# Altium PCB ADC-DAC Converter.PcbDoc
Units mil, origin at the board's own origin, x right, y up, seen from the top; angles counter-clockwise.
Board outline 2000.02 x 2600 mil, 2 copper layers (Top Layer, Bottom Layer); 39 components, 43 nets, 181 pads, 60 vias.
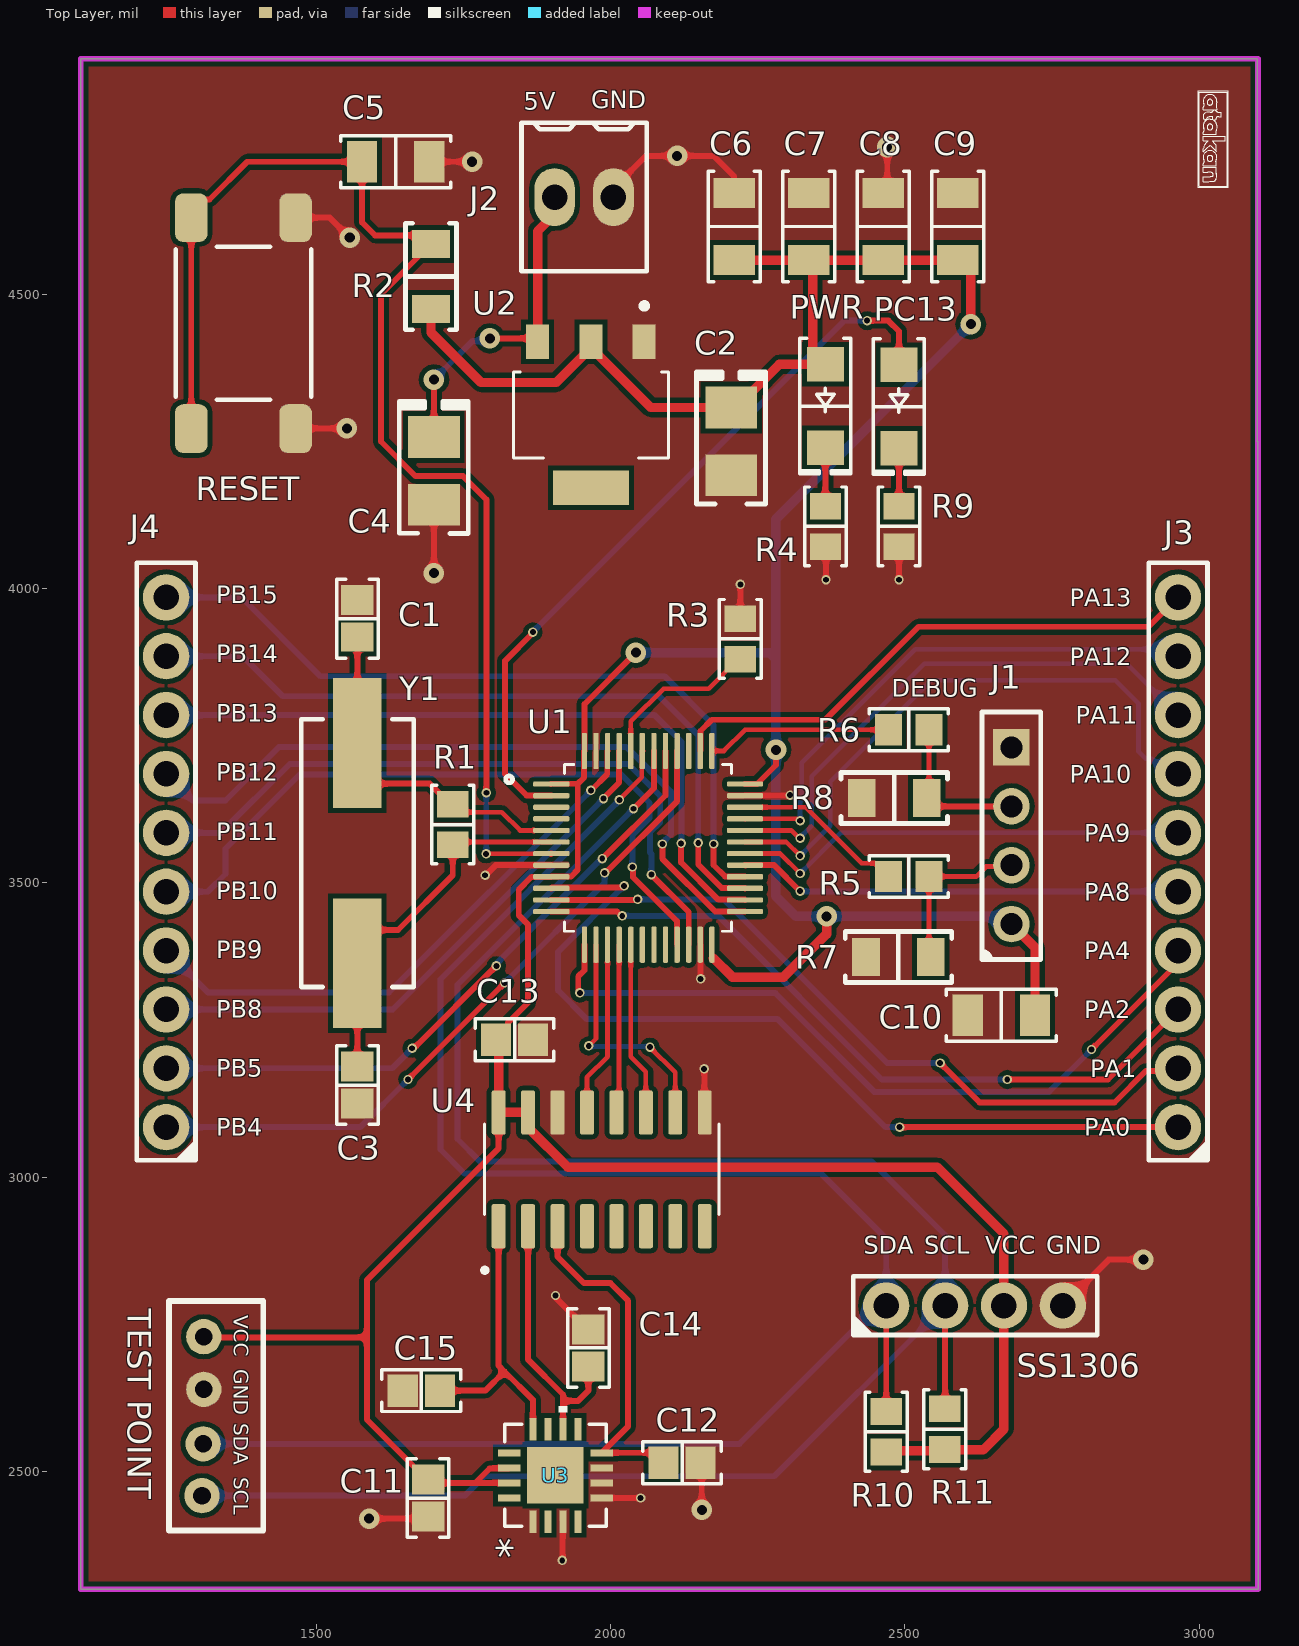
[diagram p0: Top Layer view]
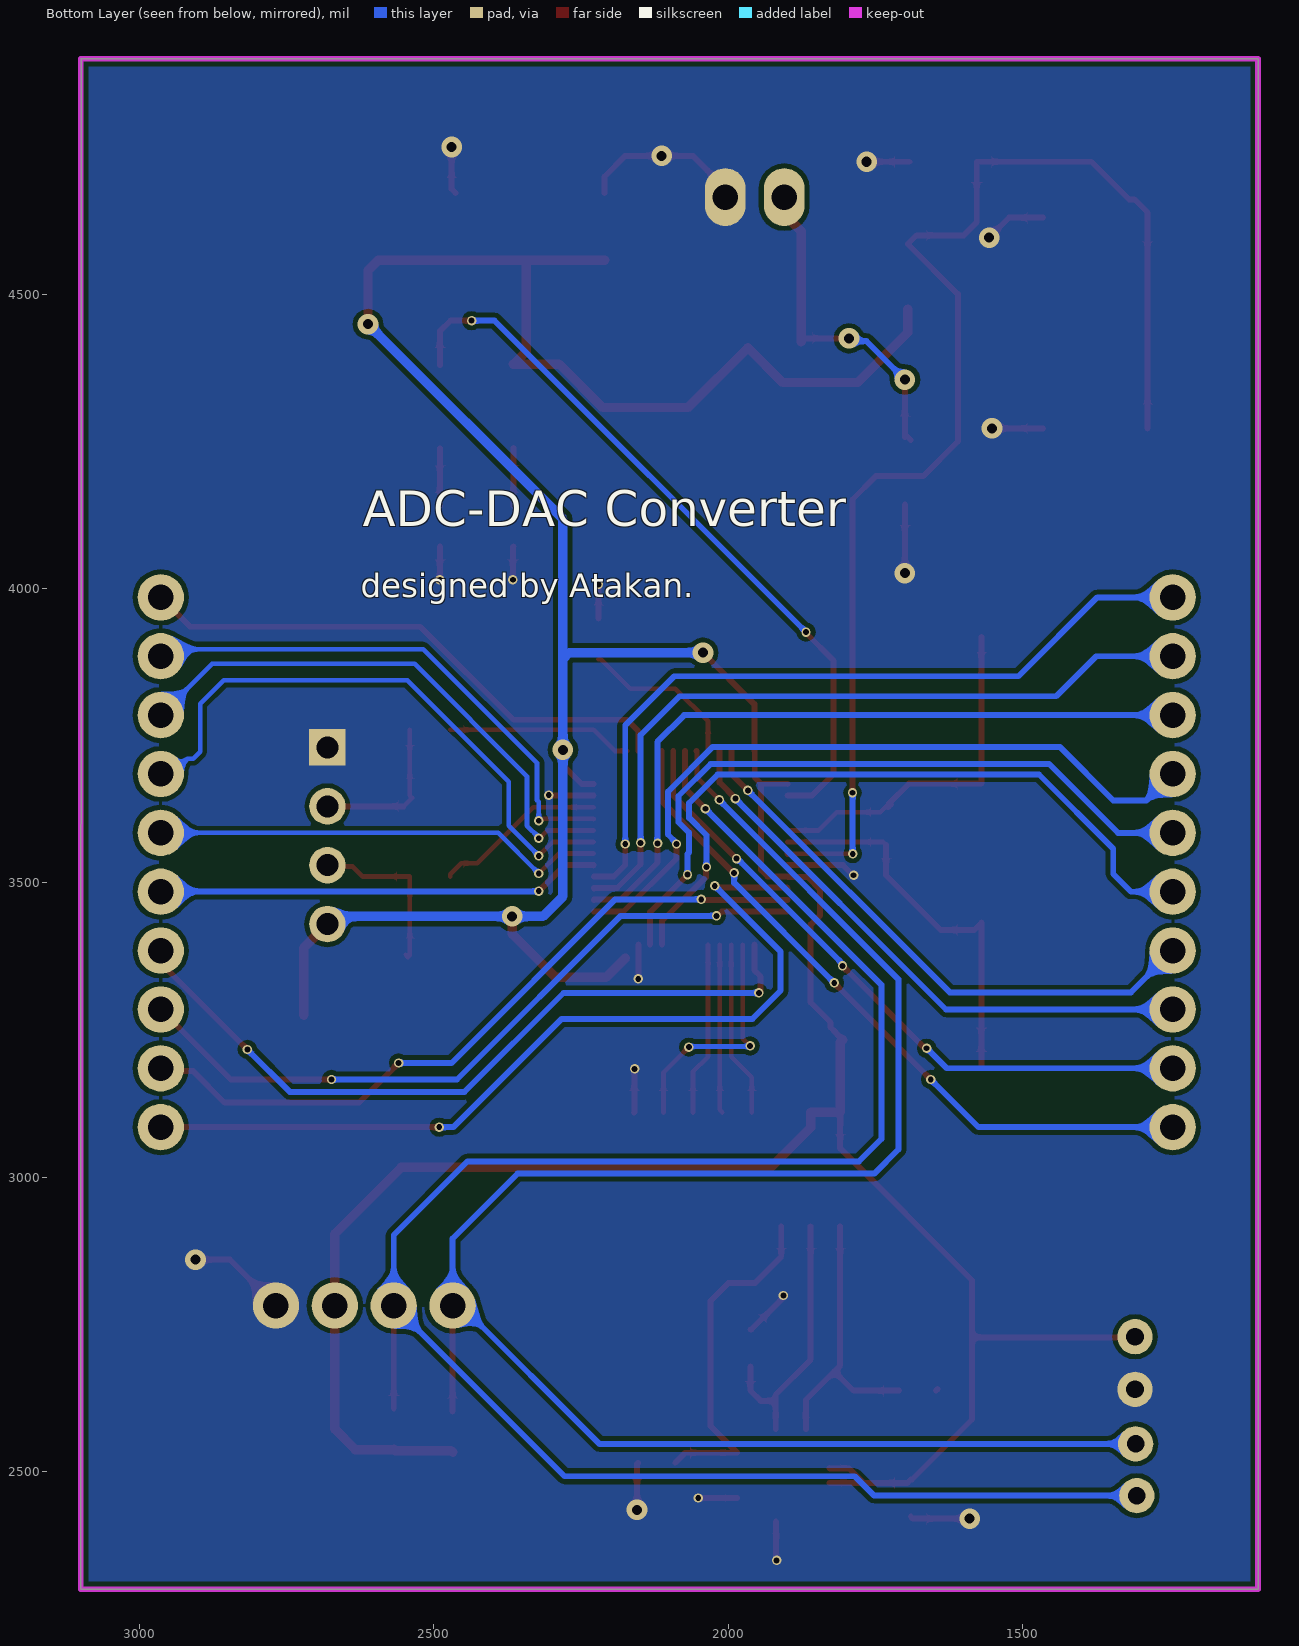
[diagram p1: Bottom Layer view, seen from below]
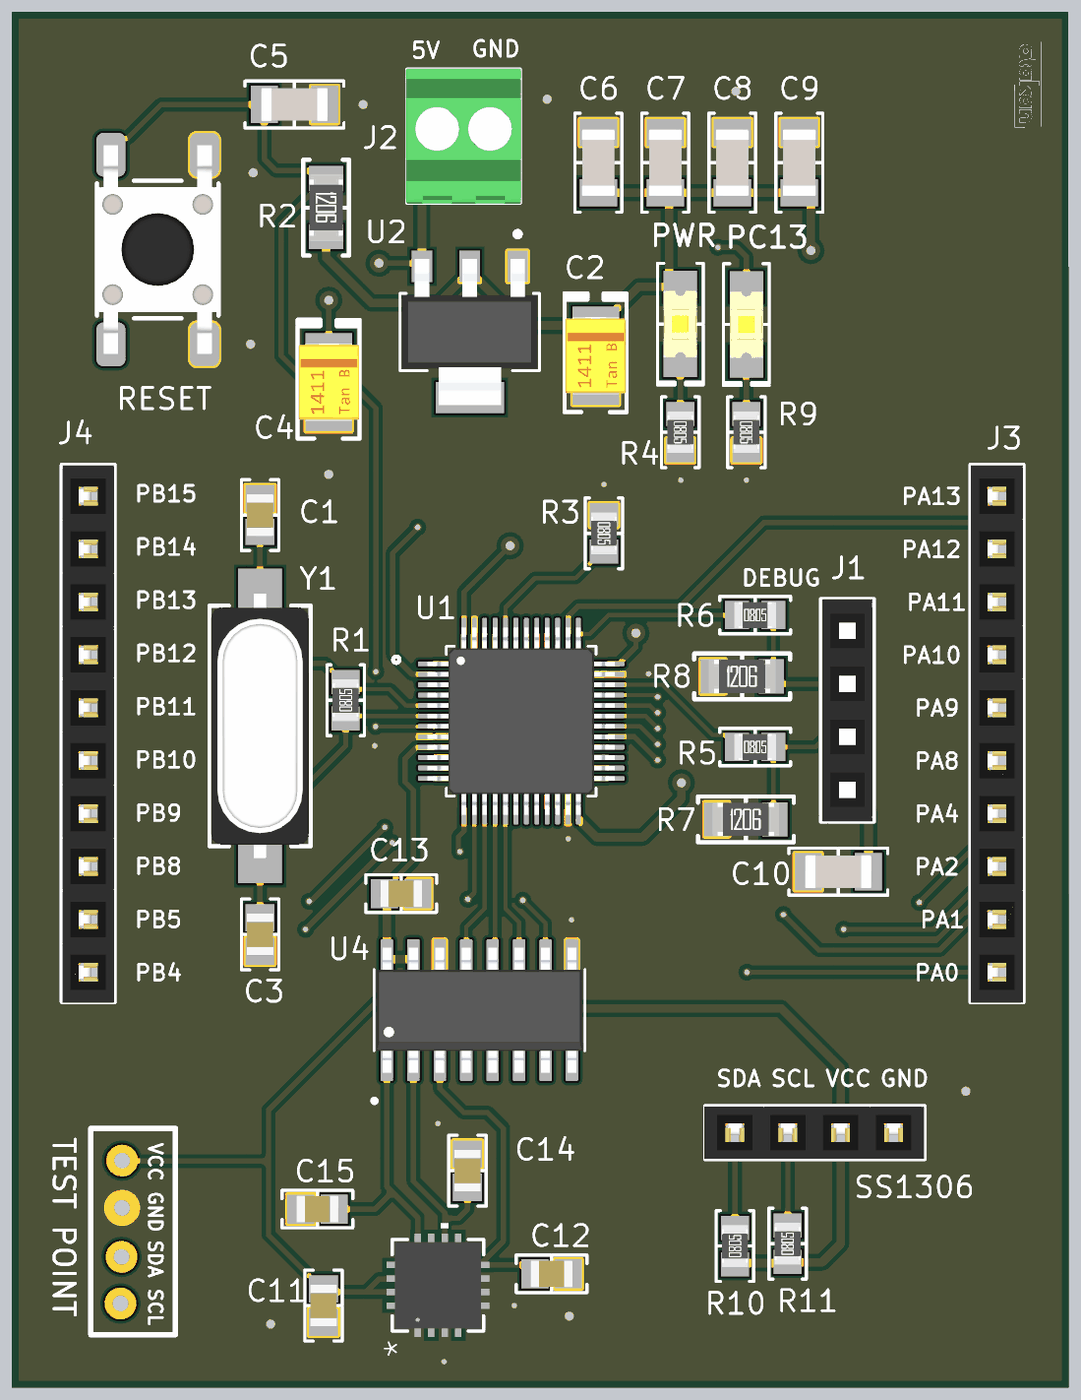
[diagram p2: 3D render of the assembled board from above, using the file's embedded part models]

## Layer stack, top to bottom
Top Solder: solder mask 0.4, Solder Resist, Dk 3.5
Top Layer: signal copper 1.4
Dielectric 1: dielectric 12.6, FR-4, Dk 4.8
Bottom Layer: signal copper 1.4
Bottom Solder: solder mask 0.4, Solder Resist, Dk 3.5

## Board outline
1100,2300 3100,2300 3100.02,2300 3099,4900 1100,4900

## Design rules (kind name [scope] priority, off if disabled: settings)
Clearance [All] p1: gap=8 ignorepadtopadclearanceinfootprint=TRUE
MinimumSolderMaskSliver [All] p1: minsoldermaskwidth=1
PolygonConnect [All] p1: connectstyle=Direct reliefconductorwidth=10 reliefentries=4 polygonreliefangle="90 Angle" airgapwidth=10
RoutingVias [All] p1: holewidth=17 width=35 viastyle="Through Hole" minholewidth=10 minwidth=10 maxholewidth=28 maxwidth=50
SilkToSolderMaskClearance [IsPad] p1: minsilkscreentomaskgap=2.9 clearancetoexposedcopper=TRUE
SolderMaskExpansion [All] p1: expansion=4
Width [All] p1: maxlimit=20 minlimit=8 preferedwidth=16 minimp=50.000000 maximp=50.000000 favimp=50.000000
28 further rules are at their usual default settings.

## Components (designator, comment, footprint, x,y, rotation, side; value= is the part's Value field where it differs from the comment)
C1 "22 pF" "CAP 0805_2012"#1 1570,3948.9 r270 top
C2 "100uF" "CAP POL 1411_3528" 2205,4250 r270 top value="100 µF"
C3 "22 pF" "CAP 0805_2012"#2 1570,3156.5 r90 top
C4 "10 µF" "CAP POL 1411_3528" 1700,4200 r270 top
C5 "0.1 µF" "CAP 1206_3216 - 0.8MM" 1635,4725 r180 top
C6 "0.1 µF" "CAP 1206_3216 - 0.8MM" 2210,4615 r270 top
C7 "0.1 µF" "CAP 1206_3216 - 0.8MM" 2336.67,4615 r270 top
C8 "0.1 µF" "CAP 1206_3216 - 0.8MM" 2463.33,4615 r270 top
C9 "0.1 µF" "CAP 1206_3216 - 0.8MM" 2590,4615 r270 top
C10 "0.1 µF" "CAP 1206_3216 - 0.8MM" 2663.91,3275 r0 top
C11 "0.1 µF" "CAP 0805_2012"#2 1690,2455 r90 top
C12 "0.1 µF" "CAP 0805_2012"#2 2121.5,2515 r180 top
C13 "0.1 µF" "CAP 0805_2012"#2 1836.96,3233.63 r180 top
C14 "0.1 µF" "CAP 0805_2012"#2 1962.4,2710 r270 top
C15 "0.1 µF" "CAP 0805_2012"#2 1678.5,2637.4 r0 top
J1 "SSW-104-03-T-S" "SAMTEC SSW-104-03-T-S" 2681,3580 r90 top
J2 "282834-2" "TE 282834-2" 1955,4665 r0 top
J3 "M20-7821042" "HARWIN M20-7821045" 2964,3535 r180 top
J4 "M20-7821042" "HARWIN M20-7821045" 1245,3535 r180 top
PC13 "Yellow" "LED 1206_3216 YELLOW" 2490,4309.13 r270 top (schematic designator D2)
PWR "Yellow" "LED 1206_3216 YELLOW" 2365,4310 r270 top (schematic designator D1)
R1 "1 MOhms" "RES 0805_2012" 1732,3599 r90 top
R2 "10 kOhms" "RES 1206_3216" 1695,4530 r270 top
R3 "10kΩ" "RES 0805_2012" 2220.47,3914.45 r270 top value=10k?
R4 "470Ω" "RES 0805_2012" 2365,4105.55 r270 top value=470?
R5 "22Ω" "RES 0805_2012" 2506.55,3510.76 r0 top value=22?
R6 "22Ω" "RES 0805_2012" 2506.55,3760 r0 top value=22?
R7 "10 kOhms" "RES 1206_3216" 2489,3374 r0 top
R8 "10 kOhms" "RES 1206_3216" 2481.94,3644.24 r0 top
R9 "470Ω" "RES 0805_2012" 2490,4105.55 r270 top value=470?
R10 "4.7kΩ" "RES 0805_2012" 2468.33,2567.55 r90 top value=4.7k?
R11 "4.7kΩ" "RES 0805_2012" 2567.9,2572 r90 top value=4.7k?
RESET "FSM6JSMA" "TE FSM6JSMA" 1376.42,4450.87 r180 top (schematic designator S1)
SS1306 "M20-7820442" "HARWIN M20-7820445" 2618.33,2782 r90 top (schematic designator J5)
U1 "STM32F103C8T6" QFP50P900X900X160-48N 2063.9,3559.57 r0 top
U2 "LT1117CST-3.3" REG_LT1117CST-3.3 1966.73,4295 r270 top
U3 "ADXL325BCPZ-RL7" CP_16_5A_ADI-M 1906.5,2493.46 r90 top
U4 "MCP3208-CI/SL" SOIC127P600X175-16N 1985,3013.35 r90 top
Y1 "8 MHz" "ABRACON ABLS" 1570,3550.47 r90 top

## Footprints (in the part's own frame and the unit in brackets; to place one, negate y for a bottom-side part, rotate by r counter-clockwise, add the part's x,y. Pads: shape width x height; smd on the part's side, far side on the other; paste and mask are expansions set on the pad)
"ABRACON ABLS" [mm] "Crystal, 2-Leads, Body 4.70x11.40mm, Pitch 8.80mm, IPC Medium Density"
  rect 5.6x2.1 smd: 1(-4.75,0) 2(4.75,0)
  silkscreen extent -5.77,-2.43 5.77,2.43, body extent -6.35,-2.35 6.35,2.35, height 4.2
"CAP 0805_2012"#1 [mm] "Chip Capacitor, 2-Leads, Body 2.00x1.20mm, IPC Medium Density"
  rect 1.3x1.4 smd: 1(-0.8,0)
  rect 1.249x1.4 smd: 2(0.8,0)
  silkscreen extent -1.7,-0.9 1.7,0.9, body extent -1,-0.64 1,0.64, height 1.26
"CAP 0805_2012"#2 [mm] "Chip Capacitor, 2-Leads, Body 2.00x1.20mm, IPC Medium Density"
  rect 1.3x1.4 smd: 1(-0.8,0) 2(0.8,0)
  silkscreen extent -1.7,-0.9 1.7,0.9, body extent -1,-0.64 1,0.64, height 1.26
"CAP 1206_3216 - 0.8MM" [mm] "Chip Capacitor, 2-Leads, Body 3.25x1.60mm, IPC Medium Density"
  rect 1.3x1.8 smd: 1(-1.45,0) 2(1.45,0)
  silkscreen extent -2.37,-1.12 2.37,1.12, body extent -1.6,-0.8 1.6,0.8, height 0.8
"CAP POL 1411_3528" [mm] "Molded Capacitor, 2-Leads, Body 3.50x2.80mm, IPC Medium Density"
  rect 1.8x2.23 smd: 1(-1.46,0) 2(1.46,0)
  silkscreen extent -3,-1.5 2.71,1.48, body extent -1.87,-1.45 1.86,1.45, height 2
CP_16_5A_ADI-M [mil]
  rect 38x12 smd paste+0 mask+0: 1(-78.5,38.39) 2(-78.5,12.8) 3(-78.5,-12.8) 4(-78.5,-38.39) 9(78.5,-38.39) 10(78.5,-12.8) 11(78.5,12.8) 12(78.5,38.39)
  rect 12x38 smd paste+0 mask+0: 5(-38.39,-78.5) 6(-12.8,-78.5) 7(12.8,-78.5) 8(38.39,-78.5) 13(38.39,78.5) 14(12.8,78.5) 15(-12.8,78.5) 16(-38.39,78.5)
  rect 96x96 smd paste+0 mask+0: 17(0,0)
  silkscreen extent -86,-86 118,86, body extent -81,-81 81,81, height 59
"HARWIN M20-7820445" [mm] "2.54mm DIL PC TAIL PIN HEADER ASSEMBLY"
  round 2 hole 1.1: 1(0,3.81) 2(0,1.27) 3(0,-1.27) 4(0,-3.81)
  silkscreen extent -1.27,-5.3 1.27,5.27, body extent -1.25,-5.28 1.25,5.28, height 8.5
"HARWIN M20-7821045" [mm] "2.54mm DIL PC TAIL PIN HEADER ASSEMBLY"
  round 2 hole 1.1: 1(0,11.43) 2(0,8.89) 3(0,6.35) 4(0,3.81) 5(0,1.27) 6(0,-1.27) 7(0,-3.81) 8(0,-6.35) 9(0,-8.89) 10(0,-11.43)
  silkscreen extent -1.27,-12.93 1.27,12.89, body extent -1.25,-12.9 1.25,12.9, height 8.5
"LED 1206_3216 YELLOW" [mm] "Chip Diode, 2-Leads, Body 3.13x1.55mm, IPC Medium Density"
  rect 1.5x1.6 smd: 1(-1.8,0) 2(1.8,0)
  silkscreen extent -2.92,-1.1 2.92,1.1, body extent -1.6,-0.8 1.6,0.8, height 0.9
QFP50P900X900X160-48N [mm]
  rrect50% 1.56x0.229 smd: 1(-4.18,2.75) 2(-4.18,2.25) 3(-4.18,1.75) 4(-4.18,1.25) 5(-4.18,0.75) 6(-4.18,0.25) 7(-4.18,-0.25) 8(-4.18,-0.75) 9(-4.18,-1.25) 10(-4.18,-1.75) 11(-4.18,-2.25) 12(-4.18,-2.75) 25(4.18,-2.75) 26(4.18,-2.25) 27(4.18,-1.75) 28(4.18,-1.25) 29(4.18,-0.75) 30(4.18,-0.25) 31(4.18,0.25) 32(4.18,0.75) 33(4.18,1.25) 34(4.18,1.75) 35(4.18,2.25) 36(4.18,2.75)
  rrect50% 0.229x1.56 smd: 13(-2.75,-4.18) 14(-2.25,-4.18) 15(-1.75,-4.18) 16(-1.25,-4.18) 17(-0.75,-4.18) 18(-0.25,-4.18) 19(0.25,-4.18) 20(0.75,-4.18) 21(1.25,-4.18) 22(1.75,-4.18) 23(2.25,-4.18) 24(2.75,-4.18) 37(2.75,4.18) 38(2.25,4.18) 39(1.75,4.18) 40(1.25,4.18) 41(0.75,4.18) 42(0.25,4.18) 43(-0.25,4.18) 44(-0.75,4.18) 45(-1.25,4.18) 46(-1.75,4.18) 47(-2.25,4.18) 48(-2.75,4.18)
  silkscreen extent -6.15,-3.6 3.6,3.6, body extent -4.5,-4.5 4.5,4.5, height 1.6
REG_LT1117CST-3.3 [mil]
  rect 59x39 smd: 1(-124,90.5) 2(-124,0) 3(-124,-90.5)
  rect 59x129 smd: 4(124,0)
  silkscreen extent -189,-132 73,132, body extent -138,-128 138,128, height 71
"RES 0805_2012" [mm] "Chip Resistor, 2-Leads, Body 2.00x1.25mm, IPC Medium Density"
  rect 1.15x1.35 smd: 1(-0.875,0) 2(0.875,0)
  silkscreen extent -1.7,-0.9 1.7,0.9, body extent -1,-0.62 1,0.63, height 0.6
"RES 1206_3216" [mm] "Chip Resistor, 2-Leads, Body 3.13x1.55mm, IPC Medium Density"
  rect 1.2x1.65 smd: 1(-1.4,0) 2(1.4,0)
  silkscreen extent -2.3,-1.1 2.3,1.1, body extent -1.6,-0.8 1.6,0.8, height 0.6
"SAMTEC SSW-104-03-T-S" [mil]
  round 62 hole 37.4: 1(-150,0) 2(-50,0) 3(50,0)
  rect 62x62 hole 37.4: 4(150,0)
  silkscreen extent -210,-50 210,50, body extent -210,-47 210,48, height 335
SOIC127P600X175-16N [mm]
  rrect25% 1.9x0.6 smd: 1(-2.455,4.445) 2(-2.455,3.175) 3(-2.455,1.905) 4(-2.455,0.635) 5(-2.455,-0.635) 6(-2.455,-1.905) 7(-2.455,-3.175) 8(-2.455,-4.445) 9(2.455,-4.445) 10(2.455,-3.175) 11(2.455,-1.905) 12(2.455,-0.635) 13(2.455,0.635) 14(2.455,1.905) 15(2.455,3.175) 16(2.455,4.445)
  silkscreen extent -4.45,-5.06 1.95,5.14, body extent -3,-4.95 3,4.95, height 1.75
"TE 282834-2" [mm]
  oval 1.75x2.5 hole 1.1: 1(-1.27,0) 2(1.27,0)
  silkscreen extent -2.7,-3.2 2.7,3.2, body extent -2.77,-3.25 2.77,3.25, height 10
"TE FSM6JSMA" [mm]
  rrect50% 1.4x2.1 smd: 1(2.25,4.55) 2(2.25,-4.55) 3(-2.25,4.55) 4(-2.25,-4.55)
  silkscreen extent -2.92,-3.3 2.92,3.3, body extent -3,-5 3,5, height 7.11

## Part data
C1 C3: library part 885012007030, "CAP CER 22PF 25V C0G/NP0 0805", Device Package="0805 (2012 Metric)", manufacturer="Würth Elektronik", Operating Temperature="-55°C ~ 125°C", Supplier Part Number 1=732-7829-1-ND, Temperature Coefficient="C0G, NP0", Tolerance=±5%, Voltage - Rated=25V, Applications="General Purpose", componentlink1description=Datasheet, componentlink1url=https://katalog.we-online.de/pbs/datasheet/885012007030.pdf, componentlink2description="DigiKey Link", componentlink2url=https://www.digikey.com/en/products/detail/würth-elektronik/885012007030/5453684, lastupdated="9.02.2024 20:15:45", Lifecycle Status=Active, Minimum Order=1, Mounting Type="Surface Mount, MLCC", Package / Case="0805 (2012 Metric)", packaging=TapeAndReel, partid=11788, Part Number=885012007030, Part Status=Active, price=0.03, series=WCAP-CSGP, Size / Dimension="0.079\" L x 0.049\" W (2.00mm x 1.25mm)", Supplier 1=DigiKey, Thickness (Max)="0.028\" (0.70mm)"
  C1: Capacitance="22 pF"
C2: library part T491T106K016AT, "CAP TANT 100UF 10% 16V 1411", Capacitance="100 uF", Device Package="1411 (3528 Metric)", ESR (Equivalent Series Resistance)=8Ohm, Lifetime @ Temp.="2000 Hrs @ 125°C", manufacturer=KEMET, Manufacturer Size Code=T, Operating Temperature="-55°C ~ 125°C", Supplier Part Number 1=399-8400-1-ND, Tolerance=±10%, Voltage - Rated="16 V", componentlink1description=Datasheet, componentlink1url=https://api.kemet.com/component-edge/download/datasheet/T491T106K016AT.pdf, componentlink2description="DigiKey Link", componentlink2url=https://www.digikey.com/en/products/detail/kemet/T491T106K016AT/2336362, Features="General Purpose", Height - Seated (Max)="0.047\" (1.20mm)", lastupdated="3.06.2024 19:29:03", Lifecycle Status=Active, Minimum Order=1, Mounting Type="Surface Mount", Package / Case="1411 (3528 Metric)", packaging=TapeAndReel, partid=5, Part Number=T491T106K016AT, Part Status=Active, price=0.42, series=T491, Size / Dimension="0.138\" L x 0.110\" W (3.50mm x 2.80mm)", Supplier 1=DigiKey, Type=Molded
C4: library part T491T106K016AT, "CAP TANT 10UF 10% 16V 1411", Device Package="1411 (3528 Metric)", ESR (Equivalent Series Resistance)=8Ohm, Lifetime @ Temp.="2000 Hrs @ 125°C", manufacturer=KEMET, Manufacturer Size Code=T, Operating Temperature="-55°C ~ 125°C", Supplier Part Number 1=399-8400-1-ND, Tolerance=±10%, Voltage - Rated="16 V", Capacitance="10 µF", componentlink1description=Datasheet, componentlink1url=https://api.kemet.com/component-edge/download/datasheet/T491T106K016AT.pdf, componentlink2description="DigiKey Link", componentlink2url=https://www.digikey.com/en/products/detail/kemet/T491T106K016AT/2336362, Features="General Purpose", Height - Seated (Max)="0.047\" (1.20mm)", lastupdated="3.06.2024 19:29:03", Lifecycle Status=Active, Minimum Order=1, Mounting Type="Surface Mount", Package / Case="1411 (3528 Metric)", packaging=TapeAndReel, partid=5, Part Number=T491T106K016AT, Part Status=Active, price=0.42, series=T491, Size / Dimension="0.138\" L x 0.110\" W (3.50mm x 2.80mm)", Supplier 1=DigiKey, Type=Molded
C5 C6 C7 C8 C9 C10: library part C1206C104K8RAC7800, "CAP CER 0.1UF 10V X7R 1206", Device Package="1206 (3216 Metric)", manufacturer=KEMET, Operating Temperature="-55°C ~ 125°C", Supplier Part Number 1=399-15539-1-ND, Temperature Coefficient=X7R, Tolerance=±10%, Voltage - Rated=10V, Applications="Bypass, Decoupling", componentlink1description=Datasheet, componentlink1url=https://api.kemet.com/component-edge/download/datasheet/C1206C104K8RACTU.pdf, componentlink2description="DigiKey Link", componentlink2url=https://www.digikey.com/en/products/detail/kemet/C1206C104K8RAC7800/2215080, lastupdated="4.06.2024 19:10:37", Lifecycle Status=Active, Minimum Order=1, Mounting Type="Surface Mount, MLCC", Package / Case="1206 (3216 Metric)", packaging=TapeAndReel, partid=19429, Part Number=C1206C104K8RAC7800, Part Status=Active, price=0.07, series="SMD Comm X7R", Size / Dimension="0.126\" L x 0.063\" W (3.20mm x 1.60mm)", Supplier 1=DigiKey, Thickness (Max)="0.035\" (0.88mm)"
C11 C12 C13 C14 C15: library part 0805Y0250104KXT, "CAP CER 0.1UF 25V X7R 0805", Device Package="0805 (2012 Metric)", manufacturer="Knowles Syfer", Operating Temperature="-55°C ~ 125°C", Supplier Part Number 1=1608-1010-1-ND, Temperature Coefficient=X7R, Tolerance=±10%, Voltage - Rated=25V, Applications="Boardflex Sensitive", Capacitance="0.1 µF", componentlink1description=Datasheet, componentlink1url=https://www.knowlescapacitors.com/getattachment/2dbfc8bc-e2b3-4b4d-afb1-43b011b9ebe0/High-Std-Voltage.aspx, componentlink2description="DigiKey Link", componentlink2url=https://www.digikey.com/en/products/detail/knowles-syfer/0805Y0250104KXT/5729991, Features="Soft Termination", lastupdated="9.02.2024 20:16:06", Lifecycle Status=Active, Minimum Order=1, Mounting Type="Surface Mount, MLCC", Package / Case="0805 (2012 Metric)", packaging=TapeAndReel, partid=3471, Part Number=0805Y0250104KXT, Part Status=Active, price=0.15, series=FlexiCap™, Size / Dimension="0.079\" L x 0.049\" W (2.00mm x 1.25mm)", Supplier 1=DigiKey, Thickness (Max)="0.051\" (1.30mm)"
J1: "CONN RCPT 4POS 0.1 TIN PCB", Current Rating (Amps)="5.7A per Contact", Insulation Color=Black, manufacturer="Samtec Inc.", Material Flammability Rating="UL94 V-0", Operating Temperature="-55°C ~ 105°C", Supplier Part Number 1=SSW-104-03-T-S-ND, componentlink2description="DigiKey Link", componentlink2url=http://digikey.com/product-detail/en/samtec-inc/SSW-104-03-T-S/SSW-104-03-T-S-ND/7874034, Connector Type=Receptacle, Contact Finish - Mating=Tin, Contact Finish - Post=Tin, Contact Type=Forked, Fastening Type=Push-Pull, lastupdated="21.06.2022 15:08:52", Lifecycle Status=Active, Minimum Order=1, Mounting Type="Through Hole", Number of Positions=4, Number of Positions Loaded=All, Number of Rows=1, packaging=Bulk, Part Number=SSW-104-03-T-S, Part Status=Active, price=0.83, series=SSW, Style="Board to Board or Cable", Supplier 1=DigiKey, Termination=Solder
J2: "TERM BLK 2P SIDE ENT 2.54MM PCB", Color=Green, Current=10A, manufacturer="TE Connectivity AMP Connectors", Supplier Part Number 1=A98333-ND, Voltage=150V, componentlink1description=Datasheet, componentlink1url=https://www.te.com/commerce/DocumentDelivery/DDEController?Action=srchrtrv&DocNm=282834&DocType=Customer+Drawing&DocLang=English, componentlink2description="DigiKey Link", componentlink2url=http://digikey.com/product-detail/en/te-connectivity-amp-connectors/282834-2/A98333-ND/1150135, lastupdated="15.01.2020 04:15:38", Lifecycle Status=Active, Mating Orientation="Horizontal with Board", Minimum Order=1, Mounting Type="Through Hole", Number of Levels=1, packaging=Bulk, Part Number=282834-2, Part Status=Active, Pitch="0.100\" (2.54mm)", Positions Per Level=2, price=0.88, series=Buchanan, Supplier 1=DigiKey, Wire Gauge="16-30 AWG", Wire Termination="Screw - Rising Cage Clamp"
J3 J4: "CONN RCPT 10POS 0.1 GOLD PCB", Current Rating (Amps)=3A, Insulation Color=Black, manufacturer="Harwin Inc.", Material Flammability Rating="UL94 V-0", Operating Temperature="-40°C ~ 105°C", Supplier Part Number 1=952-1846-ND, componentlink1description=Datasheet, componentlink1url=https://cdn.harwin.com/pdfs/Harwin_PC_Connectors_M20.pdf, componentlink2description="DigiKey Link", componentlink2url=http://digikey.com/product-detail/en/harwin-inc/M20-7821042/952-1846-ND/3727813, Connector Type=Receptacle, Contact Finish - Mating=Gold, Contact Finish - Post=Tin, Contact Finish Thickness - Mating=Flash, Contact Length - Post="0.118\" (3.00mm)", Contact Type="Female Socket", Fastening Type=Push-Pull, Insulation Height="0.335\" (8.51mm)", lastupdated="21.09.2022 18:59:03", Lifecycle Status=Active, Mated Stacking Heights="11.04mm, 12.63mm", Minimum Order=1, Mounting Type="Through Hole", Number of Positions=10, Number of Positions Loaded=All, Number of Rows=1, packaging=Tube, Part Number=M20-7821042, Part Status=Active, Pitch - Mating="0.100\" (2.54mm)", price=1.39, series=M20, Style="Board to Board or Cable", Supplier 1=DigiKey, Termination=Solder
PC13 PWR: library part 5990240007F, "LED YELLOW 1206 SMD", Current - Test=20mA, Device Package="1206 (3216 Metric)", Lens Color=0.80mm, manufacturer=Dialight, Millicandela Rating=126mcd, Supplier Device Package=1206, Supplier Part Number 1=350-4363-1-ND, Voltage - Forward (Vf) (Typ)=2.1V, Color=Yellow, componentlink1description=Datasheet, componentlink1url=http://www.dialightsignalsandcomponents.com/Assets/Brochures_And_Catalogs/Indication/CBI_SMD_new/Dialight_CBI_data_599-1206_Apr2018.pdf, componentlink2description="DigiKey Link", componentlink2url=https://www.digikey.com/en/products/detail/dialight/5990240007F/9385418, Configuration=Standard, Height (Max)=0.80mm, lastupdated="3.06.2024 20:01:38", Lens Size="2.00mm x 1.60mm", Lens Style="Rectangle with Flat Top", Lifecycle Status=Active, Minimum Order=1, Mounting Type="Surface Mount", Package / Case="1206 (3216 Metric)", packaging=TapeAndReel, partid=1, Part Number=5990240007F, Part Status=Active, price=0.04, series=599, Size / Dimension="3.20mm L x 1.60mm W", Supplier 1=DigiKey, Viewing Angle=140°, Wavelength - Dominant=590nm
R1: library part RCS08051M00FKEA, "RES SMD 1M OHM 1% 1/2W 0805", Device Package="0805 (2012 Metric)", manufacturer="Vishay Dale", Operating Temperature="-55°C ~ 155°C", Power (Watts)="0.5W, 1/2W", Ratings=AEC-Q200, Supplier Device Package=0805, Supplier Part Number 1=541-2853-1-ND, Temperature Coefficient=±100ppm/°C, Tolerance=±1%, componentlink1description=Datasheet, componentlink1url=http://www.vishay.com/docs/20065/rcse3.pdf, componentlink2description="DigiKey Link", componentlink2url=https://www.digikey.com/en/products/detail/vishay-dale/RCS08051M00FKEA/5866999, Composition="Thick Film", Features="Automotive AEC-Q200, Pulse Withstanding", Height - Seated (Max)="0.020\" (0.50mm)", lastupdated="8.02.2024 21:02:38", Lifecycle Status=Active, Minimum Order=1, Number of Terminations=2, Package / Case="0805 (2012 Metric)", packaging=TapeAndReel, partid=27791, Part Number=RCS08051M00FKEA, Part Status=Active, price=0.02, Resistance="1 MOhms", series="RCS e3", Size / Dimension="0.079\" L x 0.049\" W (2.00mm x 1.25mm)", Supplier 1=DigiKey
R2 R7 R8: library part ESR18EZPF1002, "RES SMD 10K OHM 1% 1/2W 1206", Device Package="1206 (3216 Metric)", manufacturer="Rohm Semiconductor", Operating Temperature="-55°C ~ 155°C", Power (Watts)="0.5W, 1/2W", Ratings=AEC-Q200, Supplier Device Package=1206, Supplier Part Number 1=RHM10.0KAFCT-ND, Temperature Coefficient=±100ppm/°C, Tolerance=±1%, componentlink1description=Datasheet, componentlink1url=https://www.rohm.com/datasheet/ESR01MZPF/esr-e, componentlink2description="DigiKey Link", componentlink2url=https://www.digikey.com/en/products/detail/rohm-semiconductor/ESR18EZPF1002/1983592, Composition="Thick Film", Features="Automotive AEC-Q200, Pulse Withstanding", Height - Seated (Max)="0.026\" (0.65mm)", lastupdated="9.02.2024 20:54:45", Lifecycle Status=Active, Minimum Order=1, Number of Terminations=2, Package / Case="1206 (3216 Metric)", packaging=TapeAndReel, partid=26965, Part Number=ESR18EZPF1002, Part Status=Active, price=0.02, Resistance="10 kOhms", series=ESR, Size / Dimension="0.126\" L x 0.063\" W (3.20mm x 1.60mm)", Supplier 1=DigiKey
R3 R4 R5 R6 R9 R10 R11: library part CPF0805B22RE1, "RES SMD 22 OHM 0.1% 1/10W 0805", Device Package="0805 (2012 Metric)", manufacturer="TE Connectivity Passive Product", Operating Temperature="-55°C ~ 155°C", Power (Watts)="0.1W, 1/10W", Resistance="22 Ohms", Supplier Device Package=0805, Supplier Part Number 1=A103179CT-ND, Temperature Coefficient=±25ppm/°C, Tolerance=±0.1%, componentlink1description=Datasheet, componentlink1url=https://www.te.com/commerce/DocumentDelivery/DDEController?Action=srchrtrv&DocNm=1773200&DocType=DS&DocLang=English, componentlink2description="DigiKey Link", componentlink2url=https://www.digikey.com/en/products/detail/te-connectivity-passive-product/CPF0805B22RE1/2381993, Composition="Thin Film", Height - Seated (Max)="0.026\" (0.65mm)", lastupdated="8.02.2024 21:02:36", Lifecycle Status=Active, Minimum Order=1, Number of Terminations=2, Package / Case="0805 (2012 Metric)", packaging=TapeAndReel, partid=28451, Part Number=CPF0805B22RE1, Part Status=Active, price=0.12, series="CPF, Neohm", Size / Dimension="0.079\" L x 0.049\" W (2.00mm x 1.25mm)", Supplier 1=DigiKey
RESET: "SWITCH TACTILE SPST-NO 0.05A 24V", Contact Rating @ Voltage="0.05A @ 24VDC", manufacturer="TE Connectivity ALCOSWITCH Switches", Operating Force=160gf, Operating Temperature="-35°C ~ 85°C", Supplier Part Number 1=450-1133-ND, Actuator Height off PCB, Vertical=7.00mm, Actuator Orientation="Top Actuated", Actuator Type=Standard, Circuit=SPST-NO, componentlink1description=Datasheet, componentlink1url=https://www.te.com/commerce/DocumentDelivery/DDEController?Action=srchrtrv&DocNm=1308111-1_SWITCHES_CORE_PROGRAM_CATALOG&DocType=CS&DocLang=English, componentlink2description="DigiKey Link", componentlink2url=https://www.digikey.com/en/products/detail/te-connectivity-alcoswitch-switches/FSM6JSMA/525822, Illumination=Non-Illuminated, lastupdated="3.06.2024 20:19:31", Lifecycle Status=Active, Minimum Order=1, Mounting Type="Surface Mount", Outline="6.00mm x 6.00mm", packaging=Bulk, Part Number=FSM6JSMA, Part Status=Active, price=0.17, series=FSMJSMA, Supplier 1=DigiKey, Switch Function=Off-Mom, Termination Style="Gull Wing"
SS1306: "CONN RCPT 4POS 0.1 GOLD PCB", Current Rating (Amps)=3A, Insulation Color=Black, manufacturer="Harwin Inc.", Material Flammability Rating="UL94 V-0", Operating Temperature="-40°C ~ 105°C", Supplier Part Number 1=952-1791-ND, componentlink1description=Datasheet, componentlink1url=https://cdn.harwin.com/pdfs/Harwin_PC_Connectors_M20.pdf, componentlink2description="DigiKey Link", componentlink2url=https://www.digikey.com/en/products/detail/harwin-inc/M20-7820442/3727760, Connector Type=Receptacle, Contact Finish - Mating=Gold, Contact Finish - Post=Tin, Contact Finish Thickness - Mating=Flash, Contact Length - Post="0.118\" (3.00mm)", Contact Type="Female Socket", Fastening Type=Push-Pull, Insulation Height="0.335\" (8.51mm)", lastupdated="21.09.2022 18:57:11", Lifecycle Status=Active, Mated Stacking Heights="11.04mm, 12.63mm", Minimum Order=1, Mounting Type="Through Hole", Number of Positions=4, Number of Positions Loaded=All, Number of Rows=1, packaging=Tube, Part Number=M20-7820442, Part Status=Active, Pitch - Mating="0.100\" (2.54mm)", price=0.45, series=M20, Style="Board to Board or Cable", Supplier 1=DigiKey, Termination=Solder
U1: "ARM® Cortex®-M3 STM32F1 Microcontroller IC 32-Bit 72MHz 64KB (64K x 8) FLASH 48-LQFP (7x7)", Package="LQFP-48 STMicroelectronics", Check_prices=https://www.snapeda.com/parts/STM32F103C8T6/STMicroelectronics/view-part/?ref=eda, MF=STMicroelectronics, MP=STM32F103C8T6, SnapEDA_Link=https://www.snapeda.com/parts/STM32F103C8T6/STMicroelectronics/view-part/?ref=snap
U2: "Linear Voltage Regulator IC Positive Fixed 1 Output 800mA SOT-223-3", Package="SOT-223-3 Analog Devices", Check_prices=https://www.snapeda.com/parts/LT1117CST-3.3/Analog+Devices/view-part/?ref=eda, MF="Analog Devices / Linear Technology", MP=LT1117CST-3.3, SnapEDA_Link=https://www.snapeda.com/parts/LT1117CST-3.3/Analog+Devices/view-part/?ref=snap
U3: "No Description Available", Mfr_Name="Analog Devices Inc", RefDes=RefDes, Type=Type
U4: "Microchip 12 bit Serial ADC Differential Input 16-Pin SOIC", Package="SOIC-16 Microchip", Check_prices=https://www.snapeda.com/parts/MCP3208-CI/SL/Microchip/view-part/?ref=eda, MF="Microchip Technology", MP=MCP3208-CI/SL, SnapEDA_Link=https://www.snapeda.com/parts/MCP3208-CI/SL/Microchip/view-part/?ref=snap
Y1: library part ABLS-8.000MHZ-16-A-4-H-T, "CRYSTAL 8.0000MHZ 16PF SMD", ESR (Equivalent Series Resistance)="80 Ohms", Frequency Stability=±35ppm, Frequency Tolerance=±30ppm, Load Capacitance=16pF, manufacturer="Abracon LLC", Operating Mode=Fundamental, Operating Temperature="-10°C ~ 60°C", Package / Case=HC-49/US, Supplier Part Number 1=535-14942-1-ND, componentlink1description=Datasheet, componentlink1url=https://abracon.com/Resonators/abls.pdf, componentlink2description="DigiKey Link", componentlink2url=https://www.digikey.com/en/products/detail/abracon-llc/ABLS-8-000MHZ-16-A-4-H-T/9997850, Frequency="8 MHz", Height - Seated (Max)="0.165\" (4.20mm)", lastupdated="3.06.2024 20:02:02", Lifecycle Status=Active, Minimum Order=1, Mounting Type="Surface Mount", packaging=TapeAndReel, partid=58, Part Number=ABLS-8.000MHZ-16-A-4-H-T, Part Status=Active, price=0.10, series=ABLS, Size / Dimension="0.449\" L x 0.185\" W (11.40mm x 4.70mm)", Supplier 1=DigiKey, Type="MHz Crystal"

## Free pads (board coordinates)
  round 60 hole 30: 2(1309,2639.67) 3(1306,2459) 4(1308,2547) 5(1309,2729)

## Via types
v1: diameter 16, hole 10, Top Layer to Bottom Layer, tented both sides, 45 vias
v2: diameter 35, hole 17, Top Layer to Bottom Layer, tented both sides, 15 vias

## Nets (pads, with @x,y where several pads share a name; then routed paths per layer and width w, separated by ;. In a path a pad name is that pad's centre, name@x,y a point inside that pad or via, vN(x,y) a via of type N, cw(c..) or ccw(c..) an arc to the next point about the centre after c; other vN are vias at no path point)
GND: C1.1 C2.2 C3.1 C4.2 C5.1 C6.1 C7.1 C8.1 C9.1 C10.1 C11.1 C12.1 C13.1 C14.1 C15.1 J1.4 J2.2 pad.2 R3.1 R4.2 R7.1 R8.1 R9.2 RESET.3 RESET.4 SS1306.4 U1.8 U1.23 U1.35 U1.47 U2.1 U3.1 U3.3 U3.5 U3.6 U3.7 U4.9 U4.14 | length 1817.2
  Top Layer w10: RESET.3 1465.27,4272 v2(1552,4272) ; RESET.4 1523,4630 v2(1557,4596) ; v2(1590,2420) 1686.5,2420 C11.1 ; C15.1@1644.41,2640 C15.1 ; C5.1 v2(1765,4725) ; v2(1700,4026) C4.2 ; v1(1787,3513) 1788,3513 1805.04,3530.04 U1.8 ; v1(1906.5,2799) 1907.65,2797.85 1907.65,2794.28 1960.43,2741.5 C14.1 ; v1(1918,2349) 1918.65,2349.65 1918.65,2414.32 U3.3 ; U3.5 v1(2051,2455.08) ; J2.2 2005,4679.76 2060.24,4735 v2(2113.11,4735) 2175,4735 2210,4700 C6.1 ; U1.23 2152.74,3394.74 2152.74,3337.26 v1(2153,3337) ; C12.1 2155,2512.99 v2(2155,2435) ; v1(2159,3184) 2159.5,3183.5 2159.5,3110.5 U4.9 ; R3.1 v1(2220.47,4007) ; U1.35 2228.89,3648.57 2304.57,3648.57 v1(2305,3649) ; R4.2 2366,4070.1 v1(2366,4015) ; C8.1 2470,4678.75 v2(2470,4750) ; v1(2490,4015) R9.2 ; SS1306.4 2846.33,2860 v2(2905,2860)
NetC4_1: C4.1 J2.1 U2.3 | length 577.3
  Top Layer w10: C4.1@1690,4252.48 C4.1@1700,4262.48 ; C4.1 C4.1@1700,4262.48 ; v2(1700,4355) C4.1@1700,4262.48 ; v2(1795,4425) 1870.23,4425 U2.3
  Top Layer w16: U2.3 1876.23,4607.15 1905,4635.92 J2.1
  Bottom Layer w10: v2(1700,4355) 1765.22,4420.22 1790.22,4420.22 v2(1795,4425)
NetD1_2: PWR.2 R4.1 | length 99.1
  Top Layer w10: R4.1 PWR.2
NetD2_2: PC13.2 R9.1 | length 98.3
  Top Layer w10: R9.1 PC13.2
NetR3_2: R3.2 U1.44 | length 280.1
  Top Layer w8: U1.44 2034.37,3774.37 2090,3830 2166.54,3830 2216.54,3880 R3.2
NetR5_1: R5.1 U1.34 | length 294.7
  Top Layer w8: U1.34 2331.25,3628.46 2426.38,3533.34 2453.46,3533.34 2472.1,3514.7 R5.1
NetR6_1: R6.1 U1.37 | length 314.8
  Top Layer w8: U1.37 2192.6,3724.13 2228.46,3760 R6.1
OSCIN: C1.2 R1.2 U1.5 Y1.2 | length 617.9
  Top Layer w8: R1.2@1728.06,3633.45 1741.51,3620 1815.39,3620 1846.3,3589.09 U1.5
  Top Layer w10: C1.2 Y1.2 1570,3668.58 1692.93,3668.58 R1.2@1728.06,3633.45 ; R1.2@1723.54,3633.45 R1.2@1728.34,3628.65
OSCOUT: C3.2 R1.1 U1.6 Y1.1 | length 670.9
  Top Layer w8: R1.1 1736.86,3569.41 U1.6
  Top Layer w10: C3.2 Y1.1 1570,3432.36 1582.36,3420 1639,3420 1732,3513 R1.1
PA0: J3.1 U1.10 | length 1499
  Top Layer w10: U1.10 1900.5,3491.84 2019.84,3491.84 v1(2023,3495) ; v1(2491,3085) J3.1
  Bottom Layer w10: v1(2023,3495) 1911,3383 1911,3317 1959,3269 2283,3269 2467,3085 v1(2491,3085)
PA1: J3.2 U1.11 | length 1232
  Top Layer w10: U1.11 2045,3471 v1(2046,3472) ; v1(2560,3194) 2627,3127 2856,3127 2909.63,3180.63 2959.63,3180.63 J3.2
  Bottom Layer w10: v1(2046,3472) 2192,3472 2470,3194 v1(2560,3194)
PA2: J3.3 U1.12 | length 1232.1
  Top Layer w10: U1.12 2011.08,3451.3 2018.38,3444 v1(2020,3444) ; v1(2674,3166) 2845,3166 J3.3
  Bottom Layer w10: v1(2020,3444) 2182.91,3444 2460.91,3166 v1(2674,3166)
PA3: J3.4 U1.13 | length 1284.8
  Top Layer w10: v1(1948,3313) 1945.12,3315.88 1945.12,3341.12 1955.63,3351.63 U1.13 ; v1(2817,3217) 2964,3364 J3.4
  Bottom Layer w10: v1(1948,3313) 2280,3313 2448,3145 2745,3145 v1(2817,3217)
PA4: U1.14 U4.10 | length 410.7
  Top Layer w8: v1(1963,3223) 1975.31,3235.31 U1.14 ; v1(2067,3221) 2110,3178 U4.10
  Bottom Layer w8: v1(1963,3223) 1964,3222 2066,3222 v1(2067,3221)
PA5: U1.15 U4.13 | length 299.5
  Top Layer w8: U4.13 1960,3170 1995,3205 U1.15
PA6: U1.16 U4.12 | length 286.9
  Top Layer w8: U4.12 2014.51,3114.51 2014.51,3394.83 U1.16
PA7: U1.17 U4.11 | length 295.6
  Top Layer w8: U1.17 2034.37,3205 2060,3179.37 U4.11
PA8: J3.5 U1.29 | length 754.9
  Top Layer w10: U1.29@2228.98,3529.53 U1.29 2277.96,3530.04 v1(2322,3486)
  Bottom Layer w10: v1(2322,3486) 2322.5,3485.5 2963.5,3485.5 J3.5
PA9: J3.6 U1.30 | length 778.2
  Top Layer w8: U1.30 2288.18,3549.72 v1(2322,3515.9)
  Bottom Layer w8: v1(2322,3515.9) 2391.1,3585 J3.6
PA10: J3.7 U1.31 | length 1026.2
  Top Layer w8: U1.31 2298.39,3569.41 v1(2322,3545.8)
  Bottom Layer w8: v1(2322,3545.8) 2373,3596.8 2373,3672 2545,3844 2857,3844 2897,3804 2897,3723 2909.23,3710.77 2919.09,3710.77 2944.86,3685 J3.7
PA11: J3.8 U1.32 | length 949.8
  Top Layer w8: U1.32 2307.11,3589.09 2320.5,3575.7 v1(2322,3575.7)
  Bottom Layer w8: v1(2322,3575.7) 2322,3577.32 2342,3597.32 2342,3681 2533,3872 2877,3872 J3.8
PA12: J3.9 U1.33 | length 919
  Top Layer w8: U1.33@2228.85,3608.39 U1.33 2316.66,3608.78 2319.84,3605.6 v1(2322,3605.6)
  Bottom Layer w8: v1(2322,3605.6) 2322,3637.72 2325,3640.72 2325,3704 2518,3897 2952,3897 J3.9
PA15: J3.10 U1.38 | length 939.1
  Top Layer w10: U1.38 2152.99,3724.65 2152.99,3757.95 2172.04,3777 2365,3777 2523,3935 2914,3935 J3.10
PB4: J4.1 U1.40 | length 1192.9
  Top Layer w10: v1(1656,3166) v1(1820,3330) ; v1(1990,3517) 1991.55,3517 2113.11,3638.56 U1.40
  Bottom Layer w10: J4.1 1575,3085 v1(1656,3166) ; v1(1820,3330) 1990,3500 v1(1990,3517)
PB5: J4.2 U1.41 | length 1118.2
  Top Layer w10: v1(1663,3219) 1666,3219 v1(1806,3359) ; v1(1986,3541.15) 2093.43,3648.57 U1.41
  Bottom Layer w10: J4.2 1629,3185 v1(1663,3219) ; v1(1806,3359) 1806,3362.7 1984.45,3541.15 v1(1986,3541.15)
PB8: J4.3 U1.45 | length 983.5
  Top Layer w10: v1(1988,3643) 1988,3643.7 2014.68,3670.38 U1.45
  Bottom Layer w10: J4.3 1630,3285 v1(1988,3643)
PB9: J4.4 U1.46 | length 972.1
  Top Layer w10: v1(1966.73,3657) 1994.49,3684.76 1994.49,3723.62 U1.46
  Bottom Layer w10: J4.4 1316,3314 1623.73,3314 v1(1966.73,3657)
PB10: J4.5 U1.21 | length 1233.5
  Top Layer w10: v1(2037,3527) 2038.15,3525.85 2038.15,3509.55 2112.6,3435.1 2112.6,3395.51 U1.21
  Bottom Layer w10: J4.5 1316,3485 1346,3515 1346,3558 1472,3684 2018.13,3684 2066.5,3635.63 2066.5,3610.37 2037,3580.87 v1(2037,3527)
PB11: J4.6 U1.22 | length 1197.5
  Top Layer w10: v1(2069.33,3514) 2132.8,3450.54 U1.22
  Bottom Layer w10: J4.6 1338,3585 1455,3702 2030,3702 2084.5,3647.5 2084.5,3602.91 2067,3585.41 2067,3551.68 2069.33,3549.35 v1(2069.33,3514)
PB12: J4.7 U1.25 | length 1242.8
  Top Layer w10: v1(2088,3566) 2088,3541.15 2177.85,3451.3 U1.25
  Bottom Layer w10: J4.7 1290,3640 1346,3640 1437,3731 2026.46,3731 2102.5,3654.96 2102.5,3582.12 2088,3567.62 v1(2088,3566)
PB13: J4.8 U1.26 | length 1234.3
  Top Layer w10: v1(2120,3567) 2120,3534.6 2183.11,3471.5 2227.95,3471.5 U1.26
  Bottom Layer w10: J4.8 2075,3785 2120.5,3739.5 2120.5,3567.5 v1(2120,3567)
PB14: J4.9 U1.27 | length 1275.6
  Top Layer w10: v1(2149,3568) 2149,3531.06 2188.88,3491.18 2227.95,3491.18 U1.27
  Bottom Layer w10: J4.9 1375,3885 1443,3817 2083,3817 2149,3751 v1(2149,3568)
PB15: J4.10 U1.28 | length 1319.2
  Top Layer w10: v1(2175,3566) 2175,3530.51 2194.65,3510.87 2227.95,3510.87 U1.28
  Bottom Layer w10: J4.10 1373,3985 1507,3851 2092,3851 2175,3768 v1(2175,3566)
PC13: PC13.1 U1.2 | length 1259.6
  Top Layer w10: v1(1868,3926) 1868,3924.38 1821,3877.38 1821,3685 1857.34,3648.66 1898.82,3648.66 U1.2 ; v1(2436,4455) 2472,4455 2490,4437 PC13.1
  Bottom Layer w10: v1(1868,3926) 2397,4455 v1(2436,4455)
RESET: C5.2 R2.1 RESET.1 RESET.2 U1.7 | length 2232.3
  Top Layer w8: v1(1788.64,3549.36) U1.7@1898.97,3549.36
  Top Layer w10: RESET.1 RESET.2 1287.83,4639.03 1309.73,4660.92 1318.75,4660.92 1382.83,4725 C5.2 1577.91,4622.09 1600,4600 1680.12,4600 R2.1 1610,4500.12 1610,4249.76 1668.81,4190.95 1749.28,4190.95 1789,4151.24 v1(1789,3653) ; U1.7@1898.97,3549.36 U1.7 U1.7@1899.84,3550.24
  Bottom Layer w10: v1(1788.64,3549.36) 1788.82,3549.54 1788.82,3652.82 v1(1789,3653)
SCL: pad.3 R11.2 SS1306.2 U1.42 | length 3414.5
  Top Layer w8: R11.2 R11.2@2568.33,2606.88
  Top Layer w10: v1(2039,3626) 2073.74,3660.74 U1.42 ; R11.2@2568.33,2606.88 SS1306.2 SS1306.2@2568.33,2811.67
  Bottom Layer w10: pad.3 1752.27,2459 1785.27,2492 2278.33,2492 SS1306.2 2568.33,2901.67 2443,3027 1778,3027 1740,3065 1740,3327 v1(2039,3626)
SDA: pad.4 R10.2 SS1306.1 U1.43 | length 3190.6
  Top Layer w8: v1(2015,3641) 2053.26,3679.26 2053.26,3723.34 U1.43
  Top Layer w10: R10.2 SS1306.1
  Bottom Layer w10: pad.4 2219,2547 2454,2782 SS1306.1 2468.33,2895.67 2358,3006 1752,3006 1711,3047 1711,3336.3 2015,3640.3 v1(2015,3641)
SWCLK: J1.3 R6.2 R8.2 | length 267.2
  Top Layer w8: R6.2 2541,3648.18 R8.2 R8.2@2551.3,3630
  Top Layer w10: R8.2@2551.3,3630 J1.3
SWDIO: J1.2 R5.2 R7.2 | length 291.6
  Top Layer w8: R7.2@2548.06,3377.94 R7.2 2541,3377.12 R5.2 2621,3510.76 2638,3527.76 2678.76,3527.76 J1.2
VCC: C2.1 C6.2 C7.2 C8.2 C9.2 C10.2 C11.2 C13.2 J1.1 pad.5 PWR.1 R2.2 R10.1 R11.1 SS1306.3 U1.1 U1.9 U1.24 U1.36 U1.48 U2.2 U3.14 U3.15 U4.15 U4.16 | length 7583.9
  Top Layer w10: pad.5 1310,2728 1586,2728 ; C13.2 1826.06,3254.23 1826.06,3262.77 1860,3296.71 1860,3429 1844,3445 1844,3488.33 1865.51,3509.84 1898.82,3509.84 U1.9 1899.84,3510.87 1933.15,3510.87 1944.35,3522.06 1944.35,3668.35 ; U4.16 1810,3049 1586,2825 1586,2728 ; U3.15 1770,2480.67 ; U3.14 1827,2505.26 1794.59,2505.26 1770,2480.67 ; U1.1 1899.84,3668.35 1944.35,3668.35 ; v2(2043,3891) 1955.63,3803.63 U1.48 1955.12,3723.62 1955.12,3679.12 1944.35,3668.35 ; U1.36 2248.68,3667.83 2281,3700.15 v2(2281,3726) ; 1586,2728 1586,2588.53 1688.03,2486.5 C11.2 1695.83,2480.67 1770,2480.67
  Top Layer w16: R2.2 1695,4435 1780,4350 1907.73,4350 1966.73,4409 2068.25,4307.48 C2.1 2213.46,4307.48 2286.85,4380.87 PWR.1 2343.47,4402.39 2343.47,4551.11 C7.2 ; C13.2 1810,3229.1 U4.16 U4.15 1860,3084.41 1927.52,3016.89 2555.29,3016.89 2668.33,2903.85 SS1306.3 2668.33,2572 2633.33,2537 2568.45,2537 R11.1 2565.67,2535.33 2470.56,2535.33 R10.1 ; U1.24@2174.65,3372.29 2206.94,3340 2294,3340 2367,3413 v2(2367,3443) ; C6.2 C7.2 ; v2(2612,4449) 2612,4540.32 2594.41,4557.91 C9.2 C8.2 C7.2 ; J1.1@2668,3443 J1.1 2721,3390 C10.2
  Bottom Layer w16: v2(2043,3891) 2270,3891 2281,3880 ; v2(2612,4449) 2281,4118 2281,3880 ; J1.1 2667,3444 2666,3443 v2(2367,3443) 2315,3443 2281,3477 v2(2281,3726) 2281,3880
XOUT: C15.2 U3.12 U4.1 | length 492.3
  Top Layer w10: C15.2 1787.4,2637.4 1820,2670 ; U4.1 1810,2680 1820,2670 ; U3.12 1868.11,2621.89 1820,2670
YOUT: C14.2 U3.10 U4.2 | length 460.7
  Top Layer w10: U4.2 1860,2690 1919.3,2630.7 1919.3,2620 ; U3.10 1919.3,2620 ; C14.2 1962.4,2637.4 1945,2620 1919.3,2620
ZOUT: C12.2 U3.8 U4.3 | length 591.5
  Top Layer w10: U4.3 1910,2865 1955,2820 2000,2820 2030,2790 2030,2576.85 U3.8 2073.15,2531.85 C12.2
pads on no net: U1.3 U1.4 U1.18 U1.19 U1.20 U1.39 U2.4 U3.2 U3.4 U3.9 U3.11 U3.13 U3.16 U3.17 U4.4 U4.5 U4.6 U4.7 U4.8

## Polygon pours and split planes (outlines as drawn)
GND on Top Layer "GND_L01_P012" (solid, remove dead copper, pour order 12): 1100,2300 3100,2300 3100.02,2300 3099,4900 1100,4900
GND on Bottom Layer "GND_L02_P013" (solid, remove dead copper, pour order 13): 1100,2300 3100,2300 3100.02,2300 3099,4900 1100,4900

## Keep-outs
Keep-Out Layer:
  lines w10: 1100,2300 1100,4900 3100.02,4900 3100.02,2300 1100,2300

## Silkscreen, mask and mechanical layers (free items; w line width, h text height)
Top Overlay:
  drawing of 264 lines, arcs and shapes, not listed
  text "GND" at 1967,4816 h30
  text "5V" at 1852.64,4813 h30
  text "PB15" at 1330,3975 h30
  text "PA13" at 2780.01,3970 h30
  text "PB14" at 1330,3874.44 h30
  text "PA12" at 2780.01,3870 h30
  text "DEBUG" at 2478,3816 h30
  text "PB13" at 1330,3773.89 h30
  text "PA11" at 2790,3770 h30
  text "PB12" at 1330,3673.33 h30
  text "PA10" at 2780.01,3670 h30
  text "PB11" at 1330,3572.78 h30
  text "PA9" at 2805,3570 h30
  text "PB10" at 1330,3472.22 h30
  text "PA8" at 2805,3470 h30
  text "PB9" at 1330,3371.67 h30
  text "PA4" at 2805,3370 h30
  text "PB8" at 1330,3271.11 h30
  text "PA2" at 2805,3270 h30
  text "PB5" at 1330,3170.56 h30
  text "PA1" at 2815,3170 h30
  text "PB4" at 1330,3070 h30
  text "PA0" at 2805,3070 h30
  text "SDA" at 2430,2870 h30
  text "SCL" at 2533.33,2870 h30
  text "VCC" at 2636.67,2870 h30
  text "GND" at 2740,2870 h30
  text "TEST POINT" at 1180,2776.93 h40 r270
  text "VCC" at 1360,2765.43 h25 r270
  text "GND" at 1360,2673.77 h25 r270
  text "SDA" at 1360,2582.1 h25 r270
  text "SCL" at 1360,2490.43 h25 r270
Bottom Overlay:
  text "ADC-DAC Converter" at 2621,4105.55 h60
  text "designed by Atakan." at 2624.45,3985 h40

## Text inside footprints (layer, text, board x,y; h text height)
U3: Top Overlay "*" at 1856,2353 h50 r90; Mechanical 13 "*" at 1880.32,2421.46 h50 r90